# Allegro board MB1246B.brd
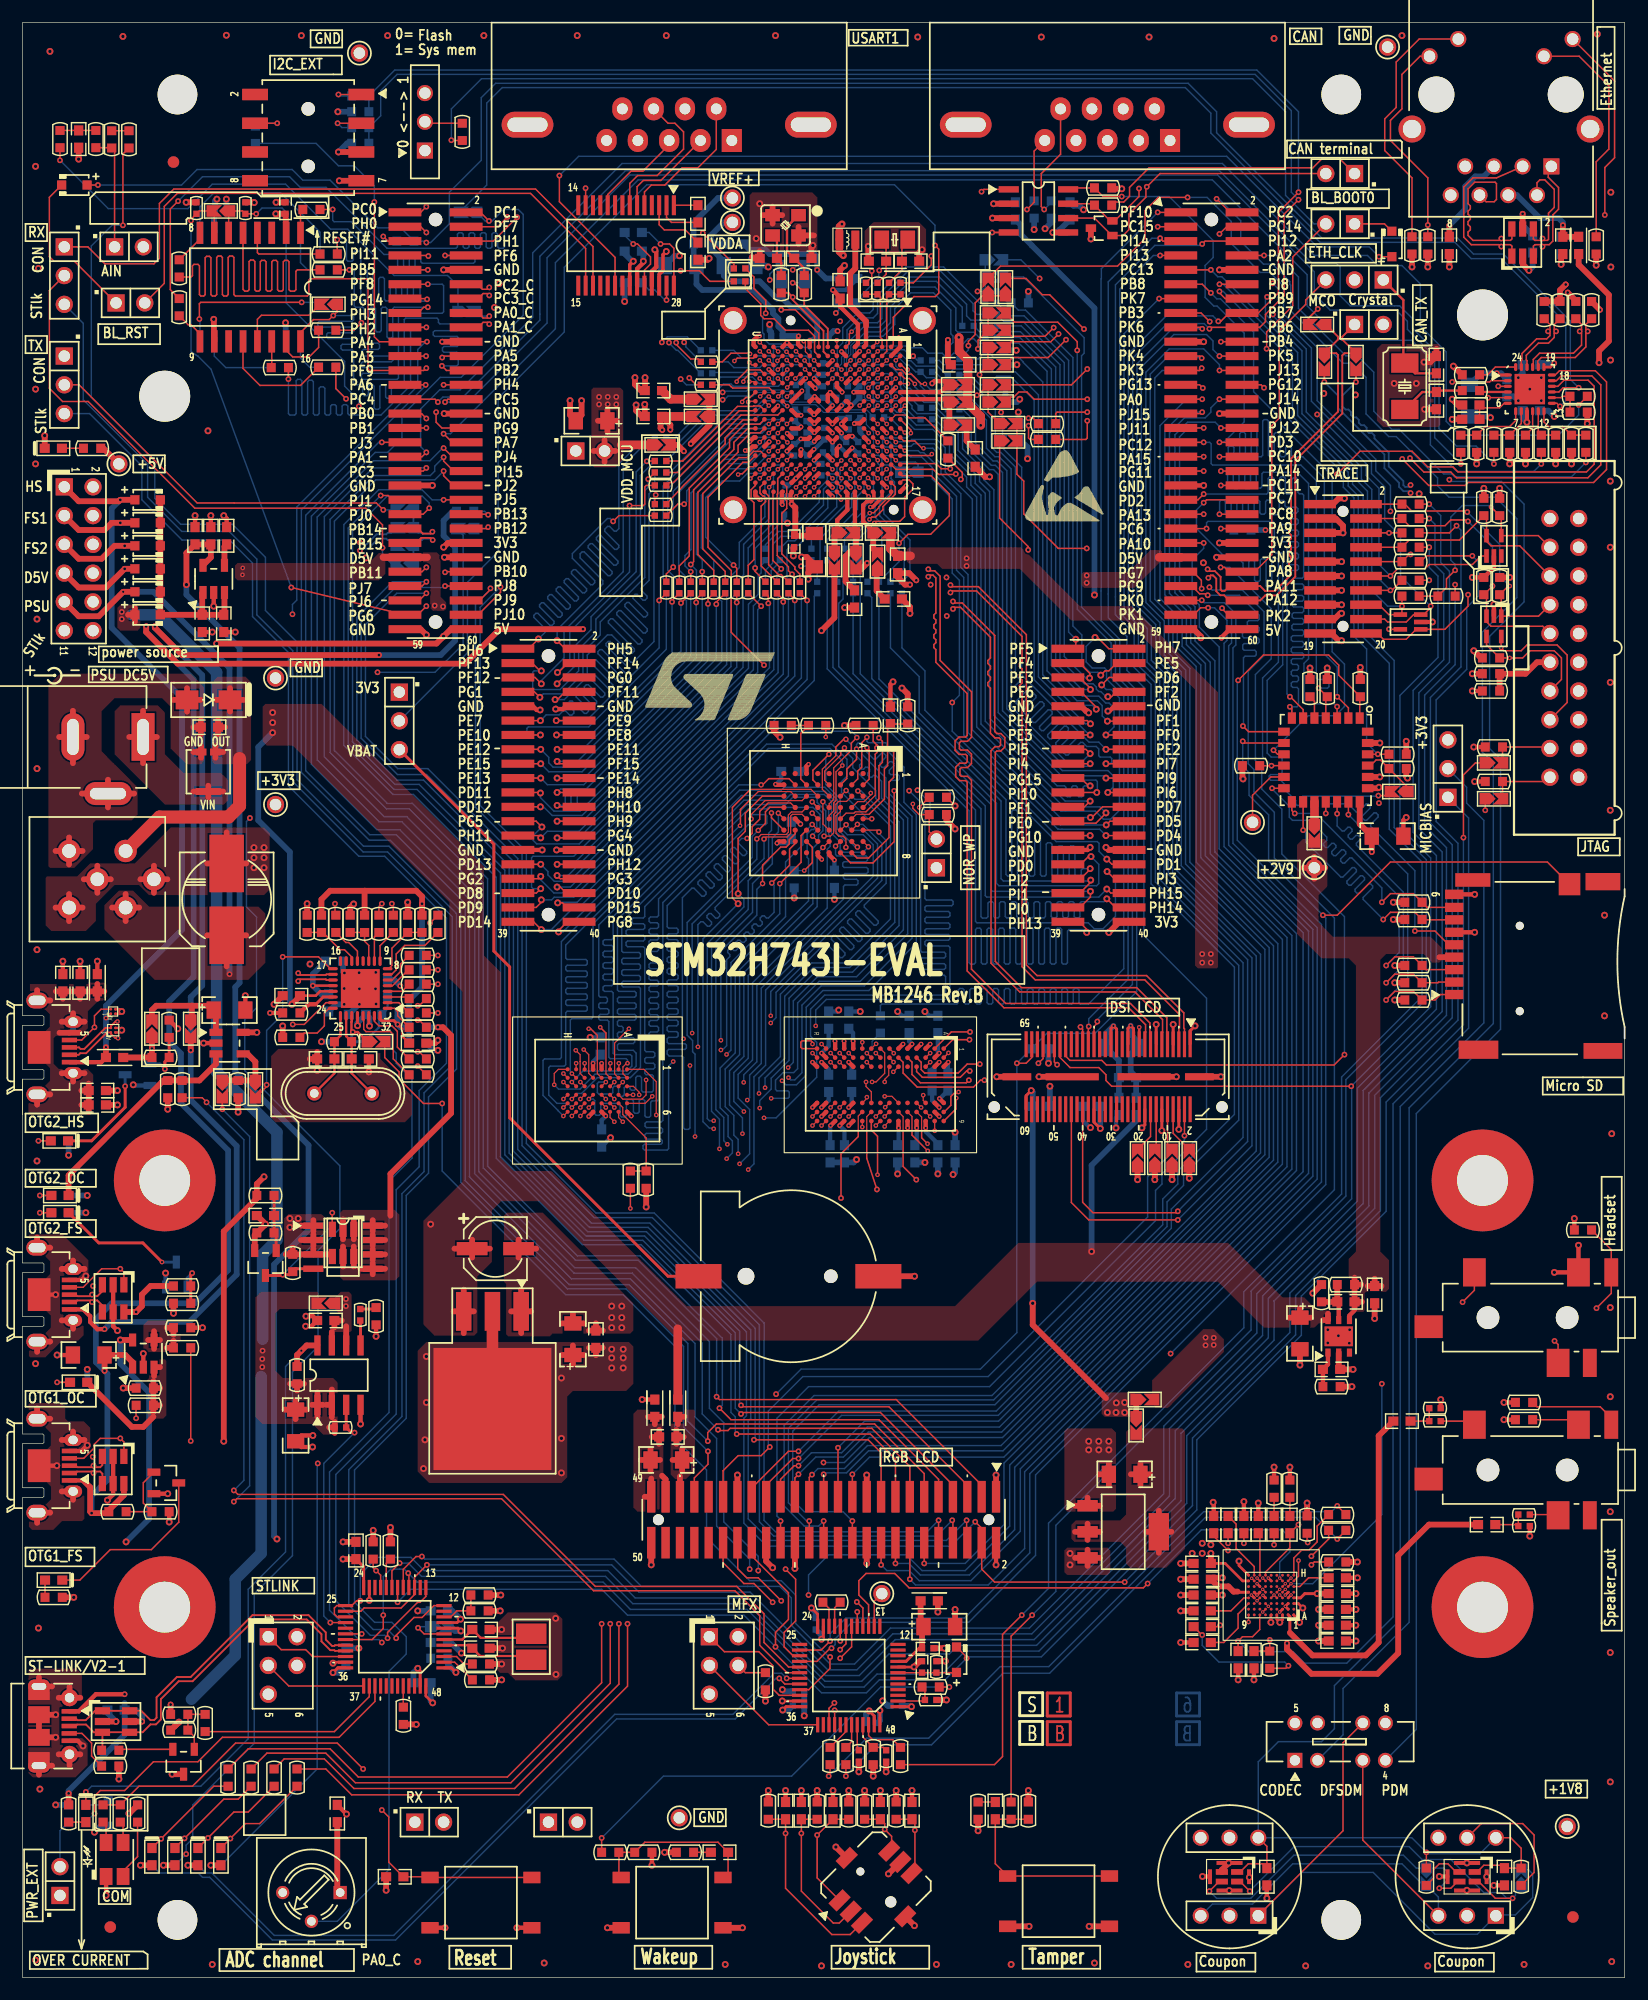
[diagram p0: board, top side]
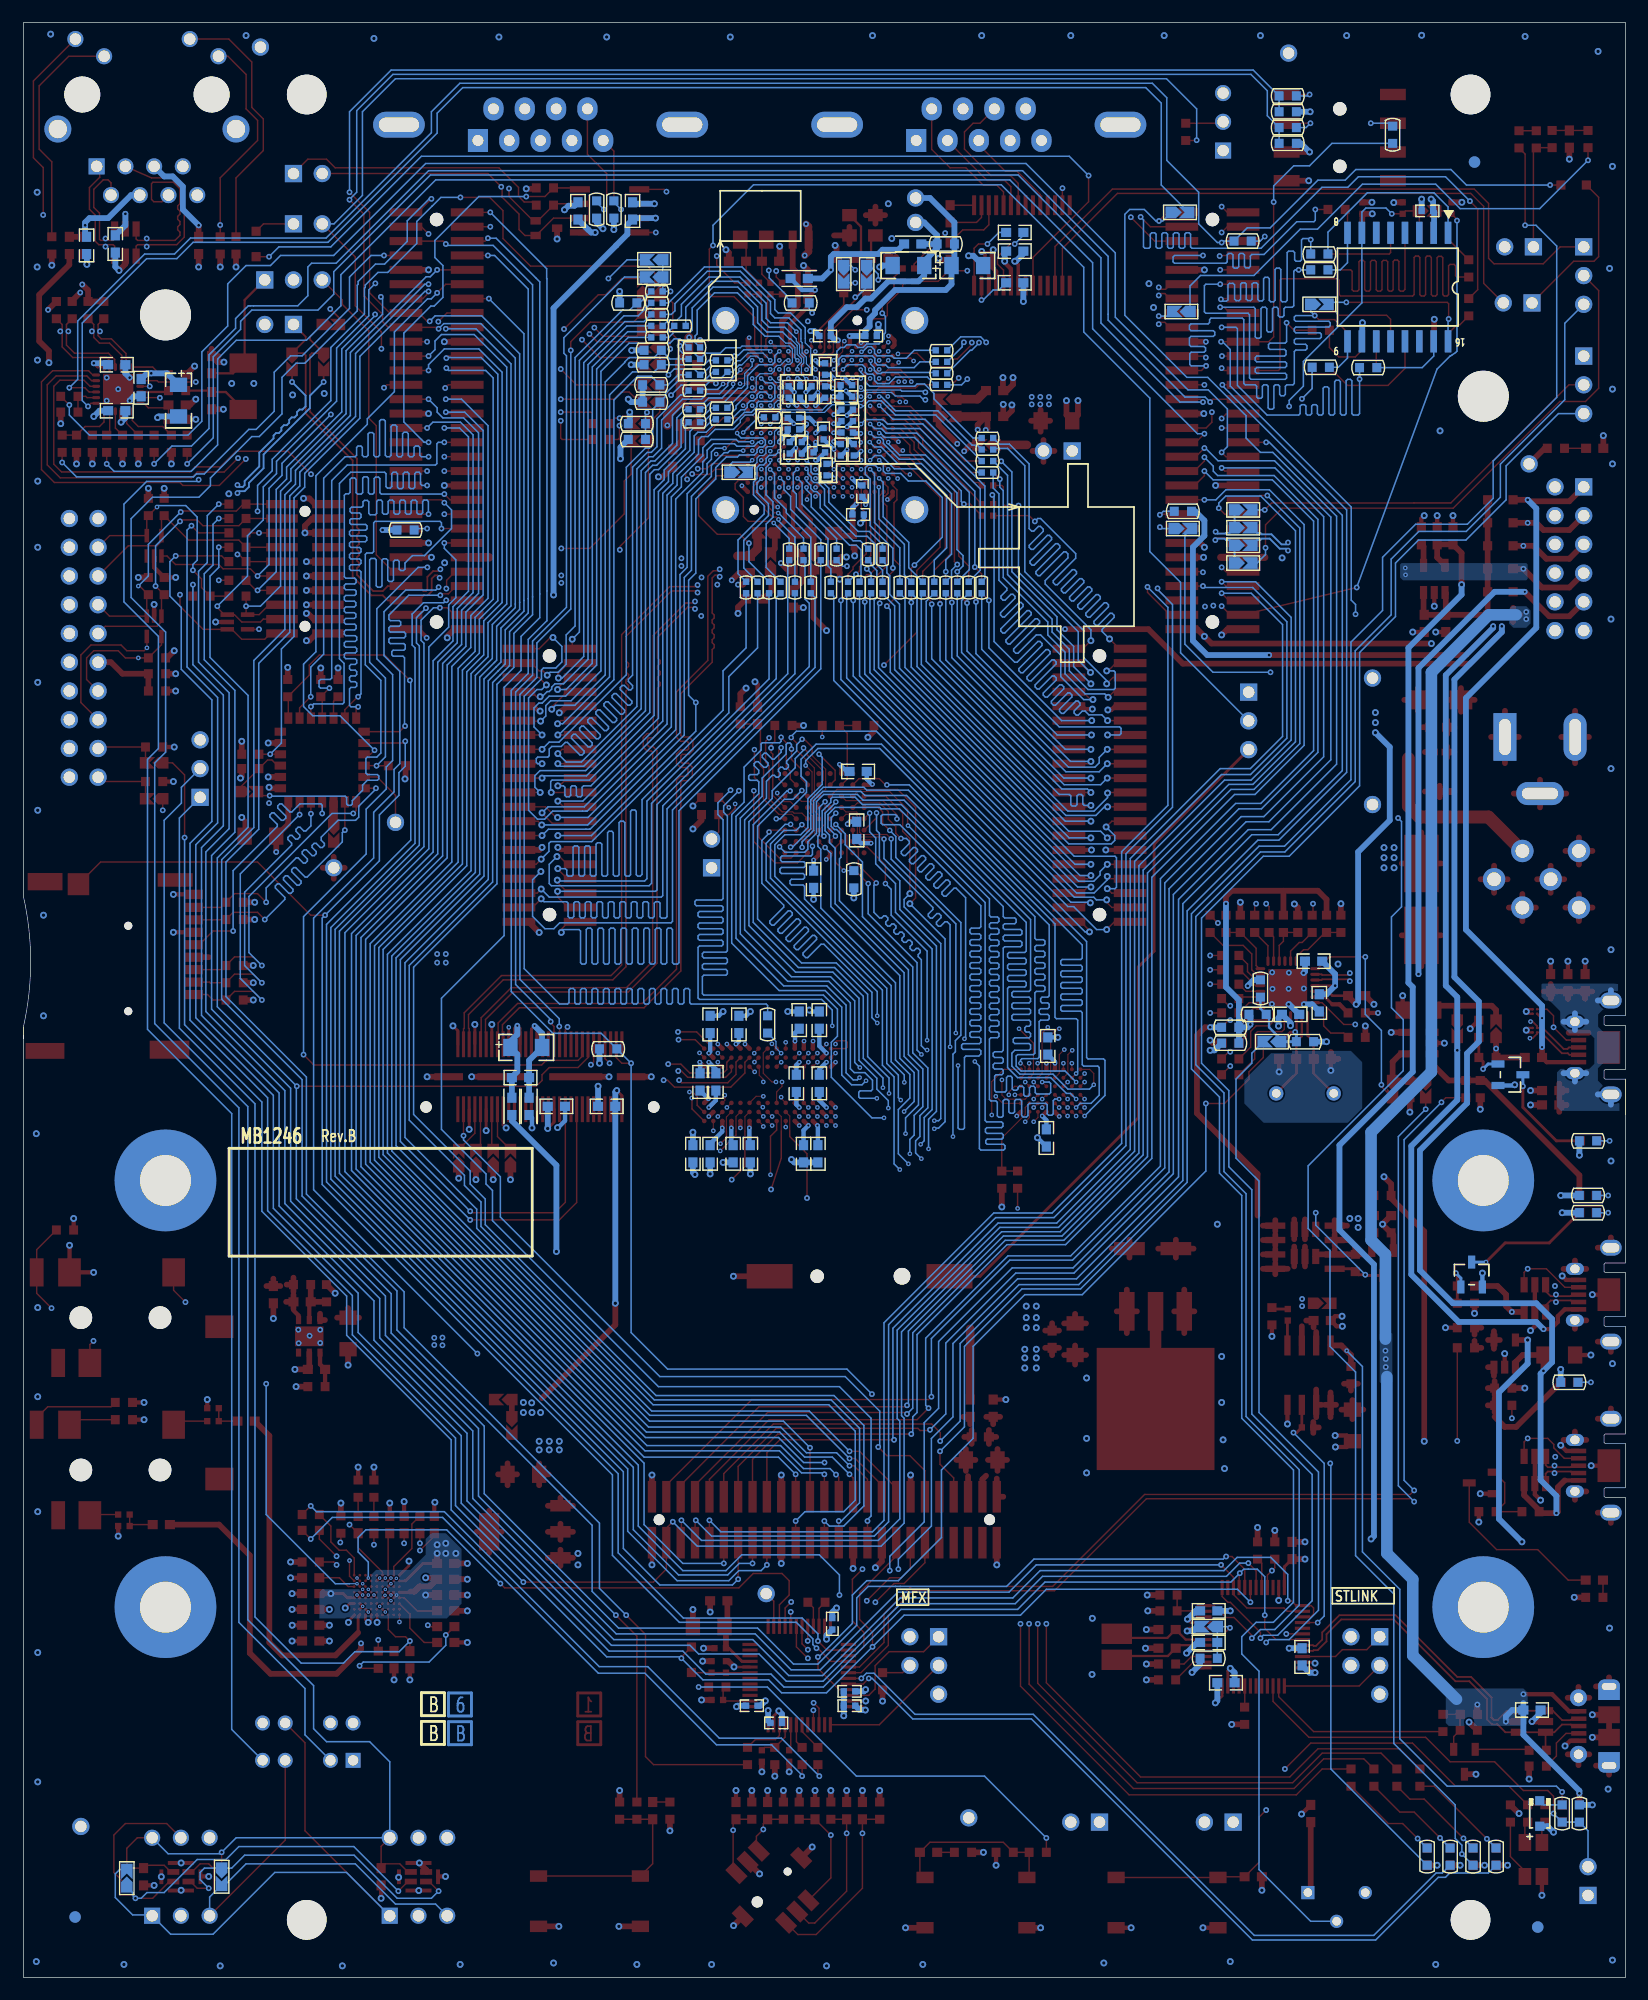
[diagram p1: board, bottom side, seen from below]

Outline 141.6 x 172.72 mm; copper layers: TOP, L2_GND, L3_VCC, L4_SIG, L5_GND, BOTTOM. Coordinates in mm from the lower left corner of the outline.
Outline path: 0,79.37 0,76.2 ; 0,79.37 0,63.13 1.79,63.13 1.89,63.03 1.89,62.38 1.79,62.27 0,62.27 0,58.38 1.79,58.38 1.89,58.27 1.89,57.62 1.79,57.52 0,57.52 0,48.01 1.79,48.01 1.89,47.91 1.89,47.26 1.79,47.16 0,47.16 0,43.26 1.79,43.26 1.89,43.16 1.89,42.51 1.79,42.41 0,42.41 0,0 141.6,0 141.6,83.26 141.6,82.95 ; 0,79.37 1.79,79.37 1.89,79.47 1.89,80.12 1.79,80.22 0,80.22 0,84.12 1.79,84.12 1.89,84.22 1.89,84.87 1.79,84.97 0,84.97 0,172.72 141.6,172.72 141.6,95.53 arc(140.96,89.75) 141.6,83.97 ; 141.6,83.97 141.6,82.95 ; 141.6,83.97 141.6,82.95

## Design rules (mm)
net group +2V9_SD: nets NETC48_1 NETM1_16
net group A0: nets A0 NETR224_2
net group A1: nets A1 NETR226_2
net group A2: nets A2 NETR222_2
net group A3: nets A3 NETR223_2
net group A4: nets A4 NETR221_2
net group A5: nets A5 NETR219_2
net group A6: nets A6 NETR250_2
net group A7: nets A7 NETR251_2
net group A8: nets A8 NETR53_2
net group A9: nets A9 NETR279_2
net group A10: nets A10 NETR50_2
net group A11: nets A11 NETR51_2
net group A12: nets A12 NETR270_2
net group A13: nets A13 NETR260_2
net group A14: nets A14 NETR261_2
net group A15: nets A15 NETR272_2
net group A16: nets A16 NETR275_1
net group A17: nets A17 NETR274_2
net group A18: nets A18 NETR271_2
net group BOOT0: nets BOOT0 NETR3_2
net group D0: nets D0 NETR77_2
net group D1: nets D1 NETR269_2
net group D2: nets D2 NETR265_2
net group D3: nets D3 NETR262_2
net group D4: nets D4 NETR54_2
net group D5: nets D5 NETR67_2
net group D6: nets D6 NETR66_2
net group D7: nets D7 NETR280_2
net group D8: nets D8 NETR68_2
net group D9: nets D9 NETR278_2
net group D10: nets D10 NETR70_2
net group D11: nets D11 NETR277_2
net group D12: nets D12 NETR69_2
net group D13: nets D13 NETR73_2
net group D14: nets D14 NETR76_2
net group D15: nets D15 NETR75_2
net group D16: nets D16 NETR71_1
net group D17: nets D17 NETR72_1
net group D18: nets D18 NETR276_1
net group D19: nets D19 NETR273_1
net group D20: nets D20 NETR74_1
net group D21: nets D21 NETR258_1
net group D22: nets D22 NETR257_1
net group D23: nets D23 NETR266_1
net group D24: nets D24 NETR256_2
net group D25: nets D25 NETR264_2
net group D26: nets D26 NETR263_2
net group D27: nets D27 NETR267_2
net group D28: nets D28 NETR243_2
net group D29: nets D29 NETR240_2
net group D30: nets D30 NETR242_2
net group D31: nets D31 NETR246_2
net group DATA: nets NETR162_2 NETR163_2
net group DIFFPAIR2: nets NETCN14_2 NETCN14_3
net group DIFFPAIR7: nets PC2_C PC3_C
net group DIFFPAIR9: nets NETCN15_15 NETCN15_17
net group DIFFPAIR10: nets NETCN15_3 NETCN15_5
net group DIFFPAIR11: nets NETCN15_9 NETCN15_11
net group DIFFPAIR12: nets NETCN18_2 NETCN18_3
net group DIFFPAIR13: nets PA11 PA12
net group LCD_B0: nets LCD_B0 NETCN9_19
net group LCD_B4: nets LCD_B4 NETLD1_2
net group LCD_B5: nets LCD_B5 NETLD2_2
net group LCD_B6: nets LCD_B6 NETLD3_2
net group LCD_B7: nets LCD_B7 NETLD4_2
net group LCD_G0: nets LCD_G0 NETCN9_17
net group MIC_CLK: nets MIC_CLK NETSB54_2
net group MIC_DATA: nets MIC_DATA NETSB55_2
net group NETC3_1: nets NETC3_1 NETC3_2
net group NETC10_1: nets NETC10_1 PC15
net group NETC11_1: nets NETC11_1 PC14
net group NETC16_1: nets NETC16_1 NETR30_1
net group NETC42_1: nets NETC42_1 NETC43_1
net group NETC61_1: nets NETC61_1 NETC61_2
net group NETC64_1: nets NETC64_1 NETC64_2
net group NETC65_1: nets NETC65_1 NETC65_2
net group NETC101_1: nets NETC101_1 NETC101_2
net group NETC147_1: nets NETC147_1 NETC147_2
net group NETCN3_7: nets NETCN3_7 NETJP1_1
net group NETCN4_4: nets NETCN4_4 PA4
net group NETCN8_2: nets NETCN8_2 PA13
net group NETCN8_4: nets NETCN8_4 PA14
net group NETCN8_8: nets NETCN8_8 PA15
net group NETCN16_2: nets NETCN16_2 PB14
net group NETCN16_3: nets NETCN16_3 PB15
net group NETD16_2: nets NETD16_2 NETJP15_2
net group NETLD6_2: nets NETLD6_2 NETR126_1
net group NETLD8_2: nets NETLD8_2 NETR146_1
net group NETM1_23: nets NETM1_23 PC6
net group NETR31_1: nets NETR31_1 PA1
net group NETR37_2: nets NETR37_2 PG13
net group NETR39_1: nets NETR39_1 PC5
net group NETR41_1: nets NETR41_1 PC4
net group NETR44_1: nets NETR44_1 PA7
net group NETR46_1: nets NETR46_1 PA2
net group NETR48_2: nets NETR48_2 PG12
net group NETR49_2: nets NETR49_2 PG11
net group NETR58_1: nets NETR58_1 PH6
net group NETR87_1: nets NETR87_1 PD7
net group NETR95_1: nets NETR95_1 PD5
net group NETR101_1: nets NETR101_1 PB5
net group NETR108_1: nets NETR108_1 PB11
net group NETR109_1: nets NETR109_1 PB10
net group NETR111_1: nets NETR111_1 PB1
net group NETR113_1: nets NETR113_1 PB0
net group NETR114_1: nets NETR114_1 PA3
net group NETR117_1: nets NETR117_1 PH4
net group NETR118_1: nets NETR118_1 PA5
net group NETR123_1: nets NETR123_1 PI11
net group NETR124_1: nets NETR124_1 PC0
net group NETR128_1: nets NETR128_1 PG10
net group NETR138_1: nets NETR138_1 NETR138_2
net group NETR166_1: nets NETR166_1 NETR166_2
net group NETR179_2: nets NETR179_2 STL_USB_DP
net group NETR185_2: nets NETR185_2 PI8
net group NETR220_2: nets NETR220_2 PI14
net group NETR245_2: nets NETR245_2 PG15
net group NETR248_1: nets NETR248_1 PH5
net group NETR252_2: nets NETR252_2 PF11
net group NETR268_2: nets NETR268_2 PG8
net group NETR282_1: nets NETR282_1 PH7
net group NETSB38_1: nets NETSB38_1 PC1
net group RD: nets RD_N RD_P
net group SDIO1: nets PC8 PD2
net group TD: nets TD_N TD_P
net group VDDA: nets VDDA VREF+
net group +1V8: nets +1V8 +1V8_LDO NETC18_2 NETC22_2 NETC30_2 NETC172_1 NETSB10_2 NETSB13_1 NETSB14_2 NETSB20_2 VDD_SDC
net group +3V3_ST_LINK: nets NETJP14_2 NETLD12_4 STM_RST
net group +5V: nets +5V NETC29_2 NETLD9_1 NETSB19_2
net group A19: nets A19 NETCN8_6 NETCN8_14 NETR236_2 NETSB8_1 PB3
net group A20: nets A20 NETCN8_16 NETCN9_3 NETCN15_37 NETR231_2 PB4
net group A21: nets A21 NETCN8_18 NETCN15_35 NETR217_2
net group A22: nets A22 NETCN8_20 NETCN15_39 NETR230_2
net group A23: nets A23 NETCN8_12 NETR234_2 NETSB11_1 PG7 SAI1_MCLKA
net group CRL: nets PD4 PD6 PE1
net group DIFFPAIR6: nets PA1_C
net group LED_STLINK: nets LED_STLINK NETLD12_2 NETLD12_3
net group MIC_VDD: nets MIC_VDD NETCN26_5 NETR206_1
net group NCS2: nets NCS2 NETR259_1 PG6
net group NETB2_2: nets NETB2_2 NETC93_1 NETR173_1 PA0
net group NETB3_2: nets NETB3_2 NETC91_1 PC13
net group NETC7_2: nets NETC7_2 NETCN5_1 NETR6_1 NETR6_2 NETR12_2 PA0_C
net group NETC8_1: nets NETC8_1 NETCN6_3 PH0
net group NETC9_1: nets NETC9_1 NETCN6_6 PH1
net group NETC35_1: nets NETC35_1 NETCN13_1 NETCN13_2 NETCN13_3 NETCN13_7 NETCN13_8
net group NETC40_1: nets NETC40_1 NETL5_1 NETR104_1 NETR116_1 NETR119_2 NETR135_2 PB13 VBUS_FS2
net group NETC55_1: nets NETC55_1 NETC55_2 NETCN19_6
net group NETC66_1: nets NETC66_1 NETC66_2 NETCN19_4
net group NETC77_1: nets NETC77_1 NETC77_2 NETC84_2
net group NETCN4_1: nets NETCN4_1 NETR160_2 NETR181_2 PB7
net group NETCN4_3: nets NETCN4_3 NETR155_2 NETR180_2 PB6
net group NETCN6_5: nets NETCN6_5 NETCN8_10 NETR284_1 RESET#
net group NETCN16_4: nets NETCN16_4 NETR105_1 PB12
net group NETLD11_1: nets NETLD11_1 NETLD11_2 NETR175_1 PWR_ENN U5V_ST_LINK USB_RENUMN VUSB_ST_LINK
net group NETR13_2: nets NETR13_2 NETR36_2 PF7
net group NETR14_2: nets NETR14_2 NETR26_1 PF6
net group NETR34_1: nets NETR34_1 NETSB12_1 NETSB44_1 PB2
net group NETR127_2: nets NETR127_2 NETSB29_1 NETSB30_1
net group NETR140_2: nets NETR141_2
net group NETR153_2: nets NETR153_2 PA9 VBUS_FS1
net group NETR225_1: nets NETR27_1 NETR29_1 NETR225_1 PG14
net group NETR228_1: nets NETR52_2 NETR228_1 NETR253_2 PH2
net group NETR229_1: nets NETR28_1 NETR229_1 NETR235_1 PH3
net group NETR232_2: nets NETR38_2 NETR232_2 PF8
net group NETR237_2: nets NETR33_2 NETR237_2 NETR244_1 PG9
net group NETR239_2: nets NETR32_1 NETR239_2 PF9
net group REFSEL0: nets REFSEL0 REFSEL1 REFSEL2 T1_D VDD_IO
net group STL_USB_D: nets STL_USB_DM

## Placement (name value [footprint] x y rotation side)
B1  TD-0341 [RESET_Black]  [PB10]  40.51 6.6 0 top
B2  WKUP  [PB10]  57.4 6.6 0 top
B3  USER (Blue)  [PB10]  91.57 6.73 0 top
B4  -  [MT-008A]  75.39 8.01 315 top
BT1  CR1220 holder  [BAT_2SM_CR1220]  67.69 61.95 0 top
C3  100nF  [0603C]  59.69 155.83 270 top
C4  100nF  [0603C]  126.11 153.03 90 top
C5  100nF  [0603C]  136.14 153.03 90 top
C6  100nF  [0603C]  59.69 152.53 90 top
C7  [N_A]  [0603C]  4.95 162.43 90 top
C8  6.7pF  [0603C]  65.91 151.89 180 top
C9  6.7pF  [0603C]  68.96 151.89 0 top
C10  10pF  [0603C]  75.56 151.64 180 top
C11  10pF  [0603C]  78.49 151.64 0 top
C12  4.7uF  [0603C]  72.26 149.1 270 top
C13  100nF  [0402C]  23.24 156.34 90 top
C14  30pF  [0603C]  124.97 142.49 90 top
C15  10uF  [0603C]  82.8 142.49 0 top
C16  30pF  [0603C]  124.97 139.32 270 top
C17  1uF_X5R_0603  [0603C]  128.02 138.94 180 top
C18  2.2uF  [0603C]  55.75 140.21 0 top
C19  470pF  [0603C]  128.02 137.67 0 top
C20  [N_A]  [0603C]  55.75 137.92 0 top
C21  4.7uF  [TAN-A]  50.29 137.54 0 top
C22  2.2uF  [0603C]  84.2 134.24 90 top
C23  1uF_X5R_0603  [0603C]  15.24 127.38 90 top
C24  100nF  [0603C]  16.64 127.38 270 top
C25  10nF_X7R_0603  [0603C]  18.03 127.38 270 top
C26  2.2uF  [0402C]  68.2 126.87 270 top
C27  2.2uF[N_A]  [1206C]  69.98 126.11 270 top
C28  10uF  [0603C]  77.34 124.84 90 top
C29  1uF_X5R_0603  [0603C]  73.53 121.79 90 top
C30  2.2uF  [0603C]  76.96 121.79 180 top
C31  100nF  [0603C]  15.88 119.63 90 top
C32  1uF_X5R_0603  [0603C]  17.78 119.63 90 top
C33  100nF  [0603C]  76.71 111.51 90 top
C34  100nF  [0603C]  16.51 110.46 180 top
C35  1uF  [TAN-A]  120.65 100.84 180 top
C36  220uF  [C310M-6]  18.03 95.25 270 top
C37  100nF  [0603C]  3.56 87.88 90 top
C38  100nF  [0603C]  5.08 87.88 90 top
C39  100nF  [0603C]  23.75 86.74 180 top
C40  4.7uF  [TAN-A]  18.29 85.47 180 top
C41  100nF  [0603C]  34.92 82.55 0 top
C42  33pF  [0603C]  26.8 81.15 180 top
C43  33pF  [0603C]  29.84 81.15 0 top
C44  100nF  [0603C]  6.6 78.36 0 top
C45  100nF  [0603C]  6.6 77.09 0 top
C46  47uF  [CAE_5R3X5R3_H5R4]  41.78 64.39 0 top
C47  10uF  [0603C]  119.51 60.33 270 top
C48  [N_A]  [0603C]  116.97 59.69 0 top
C49  100nF  [0603C]  26.8 58.04 0 top
C50  4.7uF  [TAN-A]  112.9 56.9 90 top
C51  10uF  [TAN-A]  48.64 56.39 270 top
C52  100nF  [0603C]  50.67 56.39 90 top
C53  4.7uF  [TAN-A]  5.84 54.99 0 top
C54  [N_A]  [0603C]  115.7 53.72 0 top
C55  4.7uF  [0603C]  121.92 49.15 180 top
C56  4.7uF  [TAN-A]  24.13 48.77 90 top
C57  100nF  [0603C]  57.02 47.75 180 top
C58  10uF  [TAN-A]  56.9 45.72 0 top
C59  10uF  [TAN-A]  97.41 44.45 0 top
C60  1uF  [0603C]  105.28 40.01 90 top
C61  2.2uF  [0603C]  106.55 40.01 270 top
C62  2.2uF  [0603C]  107.95 40.01 90 top
C63  2.2uF  [0603C]  109.22 40.01 90 top
C64  100nF  [0603C]  110.62 40.01 90 top
C65  100nF  [0603C]  112.01 40.01 90 top
C66  4.7uF  [0603C]  129.41 40.01 180 top
C67  100nF  [0603C]  29.46 37.72 270 top
C68  100nF  [0603C]  104.27 36.58 180 top
C69  1uF  [0603C]  116.2 35.31 0 top
C70  100nF  [0603C]  104.27 35.18 180 top
C71  4.7uF  [0603C]  116.2 33.91 0 top
C72  100nF  [0603C]  104.27 33.78 180 top
C73  1uF  [0603C]  116.2 32.51 0 top
C74  4.7uF  [0603C]  104.27 32.38 180 top
C75  100nF  [0603C]  116.2 31.11 0 top
C76  1uF  [TAN-A]  81.03 30.99 180 top
C77  1uF  [0603C]  104.27 30.99 180 top
C78  10pF  [0603C]  40.51 30.73 0 top
C79  4.7uF  [0603C]  116.2 29.72 0 top
C80  4.7uF  [0603C]  104.27 29.59 0 top
C81  10pF  [0603C]  40.51 29.08 0 top
C82  100nF  [0402C]  80.01 29.08 180 top
C83  4.7uF  [0603C]  107.44 28.07 90 top
C84  4.7uF  [0603C]  108.84 28.07 90 top
C85  100nF[N_A]  [0402C]  79.5 27.43 270 top
C86  10nF[N_A]  [0603C]  67.44 14.73 270 top
C87  10nF[N_A]  [0603C]  68.83 14.73 270 top
C88  10nF[N_A]  [0603C]  71.63 14.73 270 top
C89  10nF[N_A]  [0603C]  75.82 14.73 270 top
C90  10nF[N_A]  [0603C]  78.61 14.73 270 top
C91  100nF  [0603C]  85.98 14.73 270 top
C92  100nF  [0603C]  27.81 14.48 90 top
C93  [N_A]  [0603C]  61.59 11.05 0 top
C94  100nF  [0603C]  32.89 8.89 0 top
C95  100nF  [0603C]  109.98 8.89 270 top
C96  100nF  [0603C]  130.98 8.89 270 top
C99  100nF  [0603C]  92.58 156.08 90 bottom
C100  100nF  [0603C]  87.76 156.08 90 bottom
C101  100nF  [0603C]  53.98 154.18 0 bottom
C102  100nF  [0603C]  133.48 153.16 90 bottom
C103  100nF  [0603C]  136.02 153.03 90 bottom
C104  100nF  [0603C]  53.98 152.53 0 bottom
C105  100nF  [0603C]  53.98 149.73 0 bottom
C106  1uF  [TAN-A]  58.17 151.26 0 bottom
C107  1uF  [TAN-A]  63.37 151.26 180 bottom
C108  100nF[N_A]  [0402C]  17.5 156.08 0 bottom
C109  100nF  [0402C]  70.74 145.03 180 bottom
C110  100nF  [0402C]  66.67 145.03 0 bottom
C111  100nF  [0603C]  133.35 142.49 0 bottom
C112  100nF  [0603C]  131.19 140.46 90 bottom
C113  10uF  [TAN-A]  127.89 139.32 90 bottom
C114  100nF  [0402C]  70.74 142.11 90 bottom
C115  100nF  [0402C]  68.86 140.69 0 bottom
C116  100nF  [0603C]  133.35 138.43 180 bottom
C117  100nF  [0402C]  73.96 140.08 270 bottom
C118  100nF  [0402C]  72.95 140.08 270 bottom
C119  100nF  [0402C]  71.93 140.08 270 bottom
C120  100nF  [0402C]  70.74 140.08 270 bottom
C121  100nF  [0402C]  68.86 139.67 0 bottom
C122  100nF  [0402C]  68.78 138.53 0 bottom
C123  100nF  [0402C]  73.53 137.79 180 bottom
C124  100nF  [0402C]  68.78 137.52 0 bottom
C125  100nF  [0402C]  73.53 136.78 180 bottom
C126  100nF  [0402C]  68.78 136.5 0 bottom
C127  100nF  [0402C]  70.87 136.4 90 bottom
C128  100nF  [0402C]  73.86 135.15 90 bottom
C129  100nF  [0402C]  72.8 135.15 90 bottom
C130  100nF  [0402C]  69.34 134.98 90 bottom
C131  100nF  [0402C]  68.2 134.98 90 bottom
C132  100nF  [0402C]  71.25 134.75 0 bottom
C133  100nF  [0402C]  70.61 133.22 270 bottom
C134  100nF  [0402C]  67.44 131.32 90 bottom
C135  100nF  [0402C]  67.82 129.26 180 bottom
C136  100nF  [0603C]  67.82 106.55 180 bottom
C137  100nF  [0603C]  67.94 101.35 270 bottom
C138  100nF  [0603C]  71.75 97.03 270 bottom
C139  100nF  [0603C]  27.56 89.79 0 bottom
C140  2.2uF_X7R  [0603C]  27.05 86.11 90 bottom
C141  100nF  [0603C]  29.59 85.09 180 bottom
C142  100nF  [0603C]  73.03 84.58 90 bottom
C143  100nF  [0603C]  71.25 84.58 90 bottom
C144  100nF  [0603C]  80.9 84.2 90 bottom
C145  100nF  [0603C]  78.36 84.2 90 bottom
C146  100nF  [0603C]  51.05 82.3 90 bottom
C147  10uF  [TAN-A]  97.16 82.17 0 bottom
C148  100nF  [0603C]  97.66 79.5 180 bottom
C149  100nF  [0603C]  81.79 79.12 90 bottom
C150  100nF  [0603C]  80.39 79.12 90 bottom
C151  100nF  [0603C]  73.28 78.99 90 bottom
C152  100nF  [0603C]  71.25 78.99 90 bottom
C153  100nF  [0603C]  94.49 76.96 180 bottom
C154  100nF  [0603C]  90.04 76.96 0 bottom
C155  100nF  [0603C]  51.18 74.17 270 bottom
C156  100nF  [0603C]  82.42 72.77 270 bottom
C157  100nF  [0603C]  80.9 72.77 270 bottom
C158  100nF  [0603C]  78.87 72.77 270 bottom
C159  100nF  [0603C]  77.34 72.77 270 bottom
C160  100nF  [0603C]  72.64 72.77 270 bottom
C161  100nF  [0603C]  71.37 72.77 270 bottom
C162  100nF  [0603C]  36.83 32.38 0 bottom
C163  100nF  [0402C]  70.1 31.24 90 bottom
C164  100nF  [0603C]  36.83 29.59 180 bottom
C165  100nF  [0603C]  28.57 28.32 270 bottom
C166  100nF  [0603C]  35.31 26.04 0 bottom
C167  100nF  [0402C]  68.58 25.27 180 bottom
C168  100nF  [0402C]  77.22 24 0 bottom
C169  100nF  [0402C]  68.58 24 180 bottom
C170  100nF  [0603C]  8.26 23.62 0 bottom
C171  100nF  [0402C]  75.06 22.48 180 bottom
C172  100nF[N_A]  [0603C]  21.46 67.31 180 top
CN1  J0011D21B  [RJ45_J0011D01BNL]  135.13 160.02 0 top
CN2  DB9-male USART1  [DB9_M]  57.15 162.31 0 top
CN3  DB9-male CAN connector  [DB9_M]  95.89 162.31 0 top
CN4  F206A-2_04MGF-A  [SSM-104-L-DH]  25.24 162.56 90 top
CN5  -  [SIP2]  8.13 152.91 0 top
CN6  P1039-2_30MGF-089-1A  [FTR-130-53-L-D-LC]  36.5 137.54 270 top
CN7  P1039-2_30MGF-089-1A  [FTR-130-53-L-D-LC]  105.08 137.54 270 top
CN8  P127B-2_10MGF-079-1E7A  [FTSH-110-01-L-DV]  116.71 124.46 270 top
CN9  JTAG  [IDC20S]  135 128.91 0 top
CN10  DC-10B  [PWR_JACK_DC10]  10.64 109.6 0 top
CN11  P1039-2_20MGF-089-1A  [FTR-120-53-L-D-LC]  46.48 105.33 270 top
CN12  P1039-2_20MGF-089-1A  [FTR-120-53-L-D-LC]  95.1 105.33 270 top
CN13  PJS008-2000  [MSD_PJS008_]  132.33 85.37 90 top
CN14  475900001  [MOLEX_47590001]  4.14 82.17 270 top
CN15  -  [QSH-030-01-F-D-A]  95.95 79.58 180 top
CN16  475900001  [MOLEX_47590001]  4.14 60.33 270 top
CN17  PJ3028B-3  [PJ3028B]  136.53 58.29 180 top
CN18  475900001  [MOLEX_47590001]  4.14 45.21 270 top
CN19  PJ3028B-3  [PJ3028B]  136.53 44.83 180 top
CN20  P127B-2_25MGF-079-1A  [FTSH-125-01-F-DV]  70.8 40.44 180 top
CN21  [N_A]  [HDR_2X3-1_2R54-6]  21.72 30.1 270 top
CN22  [N_A]  [HDR_2X3-1_2R54-6]  60.71 30.1 270 top
CN23  1050170001  [MICRO_USB_B_105017]  4.04 22.21 270 top
CN24  -  [SIP2]  34.67 13.72 0 top
CN25  Coupon Connectors  [COUPON]  106.68 8.89 90 top
CN26  Coupon Connectors  [COUPON]  127.68 8.89 90 top
D1  BAT60JFILM  [SOD-323]  4.57 158.37 180 top
D2  ESDCAN02-2BWY  [SOT-323]  95.38 154.56 0 top
D3  BAT60JFILM  [SOD-323]  121.03 153.16 90 top
D4  BAT60JFILM  [SOD-323]  11.05 130.56 0 top
D5  BAT60JFILM  [SOD-323]  11.05 128.52 0 top
D6  BAT60JFILM  [SOD-323]  11.05 126.49 0 top
D7  BAT60JFILM  [SOD-323]  11.05 124.46 0 top
D8  BAT60JFILM  [SOD-323]  11.05 122.43 0 top
D9  BAT60JFILM  [SOD-323]  11.05 120.4 0 top
D10  ZEN056V130A24LS  [TYCO_ZEN056V130A24LS]  16.41 106.53 90 top
D11  ESDA14V2-2BF3  [BGA4_0R4_0R8X0R8]  8 85.34 90 top
D12  USBULC6-2F3  [BGA4_0R4_1X1]  8 83.69 90 top
D13  ESDA6V1BC6  [SOT23-6L]  8 59.99 180 top
D14  ESDA6V1BC6  [SOT23-6L]  8 44.83 180 top
D15  BAT60JFILM  [SOD-323]  82.55 28.07 90 top
D16  BAT60JFILM  [SOD-323]  7.57 14.48 90 bottom
H1  POSITION HOLE  [HOLE_C9D4R5]  12.56 70.42 0 top
H2  POSITION HOLE  [HOLE_C9D4R5]  129.04 70.42 0 top
H3  POSITION HOLE  [HOLE_C9D4R5]  12.56 32.71 0 top
H4  POSITION HOLE  [HOLE_C9D4R5]  129.04 32.71 0 top
JP1  -  [SIP2]  117.73 159.38 180 top
JP2  -  [SIP2]  117.73 146.05 0 top
JP3  -  [SIP2]  117.73 154.94 180 top
JP5  -  [SIP3]  120.27 149.99 180 top
JP6  -  [SIP2]  8.26 147.96 0 top
JP7  -  [SIP3]  3.68 143.26 270 top
JP8  -  [SIP3]  3.68 152.91 270 top
JP9  -  [SIP2]  48.9 134.87 0 top
JP10  Header 6X2  [HDR_2X6_2R54]  3.68 131.7 270 top
JP11  -  [SIP3]  33.3 113.56 270 top
JP12  -  [SIP3]  125.98 104.27 90 top
JP13  -  [SIP2]  80.77 98.04 90 top
JP14  [N_A]  [SIP2]  46.48 13.72 0 top
JP15  -  [SIP2]  3.3 7.24 90 top
L1  2.2uH(LQM2MPN2R2NG0)  [LSM2_VLS2016E_S]  72.9 153.54 0 top
L2  BEAD  [0603L]  137.54 153.03 270 top
L3  BNX002-01  [BNX001]  6.6 97.03 0 top
L4  EXC-3BP121H[BEAD]  [0603L]  6.6 87.88 270 top
L5  EXC-3BP121H[BEAD]  [0603L]  8.13 81.28 180 top
L6  BEAD(FCM1608KF-601T03)  [0603L]  55.88 50.29 270 top
L7  BEAD(FCM1608KF-601T03)  [0603L]  57.91 50.29 270 top
L8  Ferrite  [0603L]  80.14 33.27 180 top
L9  BEAD(FCM1608KF-601T03)  [0603L]  62.99 153.16 180 bottom
L10  BEAD(FCM1608KF-601T03)  [0603L]  73.03 150.11 0 bottom
L11  BEAD(FCM1608KF-601T03)  [0603L]  98.42 76.96 90 bottom
L12  BEAD(FCM1608KF-601T03)  [0603L]  96.9 76.96 90 bottom
LD1  Green  [0603D]  17.53 10.67 90 top
LD2  Orange  [0603D]  15.49 10.67 90 top
LD3  Red  [0603D]  13.46 10.67 90 top
LD4  Blue  [0603D]  11.43 10.67 90 top
LD5  Green  [0603D]  3.25 73.91 0 top
LD6  Red  [0603D]  3.3 69.09 0 top
LD7  Green  [0603D]  3.3 67.56 0 top
LD8  Red  [0603D]  4.95 52.58 0 top
LD9  red  [0603D]  2.71 135.11 180 top
LD10  Green  [0603D]  2.74 35.1 0 top
LD11  Red  [0603D]  5.59 14.48 90 top
LD12  HSMF-A201-A00J1  [LED2_3528]  8.13 10.41 0 top
M1  IP4856CX25_C_Module_REV  [WLCSP25_0R4_MOUDLE_REV]  115.19 107.57 180 top
NOREF  -  [unnamed]  12.56 139.71 0 top
NOREF#2  -  [#2]  283.34 118.87 0 top
NOREF#3  -  [#2]  4.7 228.5 0 top
NOREF#4  -  [#2]  450.6 -120.4 0 top
NOREF#5  -  [#2]  91.33 23.35 0 top
NOREF#6  -  [unnamed]  13.34 160.4 0 top
NOREF#7  -  [unnamed]  13.69 166.37 0 top
NOREF#8  -  [unnamed]  137.03 5.33 0 top
NOREF#9  -  [#2]  91.33 20.81 0 top
NOREF#10  -  [unnamed]  13.69 5.08 0 top
NOREF#11  -  [unnamed]  7.75 4.45 0 top
NOREF#12  -  [#2]  13.59 -41.66 0 top
NOREF#13  -  [unnamed]  116.56 5.08 0 top
NOREF#14  -  [#2]  -7.62 0 0 top
NOREF#15  -  [unnamed]  129.04 146.89 0 top
NOREF#16  -  [unnamed]  116.56 166.37 0 top
NOREF#17  -  [#2]  322.2 176.15 0 top
NOREF#18  -  [unnamed]  137.03 5.33 180 bottom
NOREF#19  -  [unnamed]  7.75 4.45 180 bottom
NOREF#20  -  [unnamed]  13.34 160.4 180 bottom
R3  10K  [0603R]  38.86 163.07 90 top
R4  10K  [0603R]  95.5 158.12 0 top
R5  120  [0603R]  95.5 156.59 0 top
R6  0  [0603R]  9.4 162.41 270 top
R7  270  [0603R]  122.81 153.03 270 top
R8  10K  [0603R]  124.21 153.03 270 top
R9  270  [0603R]  139.09 153.03 270 top
R10  47  [0603R]  7.87 162.41 90 top
R11  0  [0603R]  6.48 162.43 270 top
R12  0  [0603R]  3.3 162.43 270 top
R13  33  [0402R]  63.37 151 0 top
R14  33  [0402R]  63.37 149.86 0 top
R15  0  [0603R]  67.06 149.61 270 top
R16  0  [0603R]  69.09 149.61 270 top
R17  0  [0402R]  75.56 149.22 90 top
R18  0  [0402R]  76.58 149.22 90 top
R19  10K  [0402R]  15.37 156.34 90 top
R20  10K  [0402R]  19.68 156.34 90 top
R21  12K1  [0603R]  128.02 141.6 180 top
R22  50  [0603R]  134.49 147.32 90 top
R23  50  [0603R]  135.89 147.32 90 top
R24  50  [0603R]  137.29 147.32 90 top
R25  50  [0603R]  138.68 147.32 90 top
R26  33  [0603R]  25.53 156.21 0 top
R27  33  [0603R]  27.05 152.27 0 top
R28  33  [0603R]  27.05 150.88 0 top
R29  33  [0402R]  60.45 142.75 180 top
R30  0  [0603R]  128.02 140.21 180 top
R31  33  [0603R]  137.54 139.7 0 top
R32  33  [0603R]  13.84 151 270 top
R33  33  [0603R]  26.92 142.27 180 top
R34  33  [0402R]  60.45 140.72 180 top
R35  10K  [0603R]  137.54 138.3 180 top
R36  33  [0603R]  13.84 147.57 270 top
R37  33  [0603R]  90.55 137.29 180 top
R38  33  [0603R]  26.92 145.54 180 top
R39  33  [0603R]  127.13 135.51 270 top
R40  10K  [0603R]  128.52 135.51 90 top
R41  33  [0603R]  130.05 135.51 270 top
R42  10K  [0603R]  131.44 135.51 90 top
R43  10K  [0603R]  132.84 135.51 270 top
R44  33  [0603R]  134.24 135.51 270 top
R45  10K  [0603R]  135.51 135.51 90 top
R46  1K5  [0603R]  136.91 135.51 270 top
R47  0  [0603R]  138.18 135.51 270 top
R48  33  [0603R]  90.55 135.89 180 top
R49  33  [0603R]  81.79 135 90 top
R50  33  [0402R]  56.39 133.99 0 top
R51  33  [0402R]  56.39 132.97 0 top
R52  33  [0603R]  22.73 142.24 180 top
R53  33  [0402R]  56.39 131.83 0 top
R54  33  [0402R]  56.39 130.18 0 top
R55  22  [0603R]  122.68 130.18 0 top
R56  [N_A]  [0603R]  129.16 129.92 90 top
R57  [N_A]  [0603R]  130.56 129.92 90 top
R58  33  [0402R]  56.39 129.16 180 top
R59  22  [0603R]  122.68 128.91 0 top
R60  22  [0603R]  122.68 127.64 0 top
R61  22  [0603R]  122.68 126.36 0 top
R62  22  [0603R]  122.68 125.09 0 top
R63  [N_A]  [0603R]  122.68 123.44 0 top
R64  [N_A]  [0603R]  129.16 122.94 270 top
R65  [N_A]  [0603R]  130.56 122.94 90 top
R66  33  [0402R]  56.9 122.81 90 top
R67  33  [0402R]  58.04 122.81 90 top
R68  33  [0402R]  59.05 122.81 90 top
R69  33  [0402R]  60.07 122.81 90 top
R70  33  [0402R]  61.09 122.81 90 top
R71  33  [0402R]  62.1 122.81 270 top
R72  33  [0402R]  63.12 122.81 270 top
R73  33  [0402R]  64.14 122.81 90 top
R74  33  [0402R]  65.66 122.81 270 top
R75  33  [0402R]  66.67 122.81 90 top
R76  33  [0402R]  67.69 122.81 90 top
R77  33  [0402R]  68.71 122.81 90 top
R78  [N_A]  [0603R]  122.68 122.05 0 top
R79  22  [0603R]  125.86 122.05 0 top
R80  [N_A]  [0603R]  129.79 116.59 180 top
R81  [N_A]  [0603R]  129.79 115.19 180 top
R82  10K  [0603R]  113.79 113.92 90 top
R83  10K  [0603R]  115.32 113.92 90 top
R84  10K  [0603R]  118.24 113.92 270 top
R85  10K  [0603R]  129.79 113.67 0 top
R86  10K  [0603R]  78.23 111.51 270 top
R87  10K  [0603R]  67.18 110.62 180 top
R88  0  [0603R]  70.23 110.62 0 top
R89  10K  [0603R]  74.42 110.62 180 top
R90  10K  [0603R]  130.05 108.71 0 top
R91  10K  [0603R]  121.54 108.08 0 top
R92  10K  [0603R]  108.58 107.06 180 top
R93  10K  [0603R]  121.54 106.81 0 top
R94  10K  [0603R]  130.05 105.66 0 top
R95  0  [0603R]  80.9 104.27 0 top
R96  10K  [0603R]  80.9 102.74 0 top
R97  [N_A]  [0603R]  122.94 95 0 top
R98  [N_A]  [0603R]  122.94 93.47 0 top
R99  [N_A]  [0603R]  25.15 93.09 270 top
R100  0  [0603R]  26.42 93.09 90 top
R101  0  [0603R]  27.69 93.09 90 top
R102  [N_A]  [0603R]  28.96 93.09 270 top
R103  0  [0603R]  30.23 93.09 90 top
R104  0  [0603R]  31.5 93.09 90 top
R105  0  [0603R]  32.77 93.09 90 top
R106  [N_A]  [0603R]  34.04 93.09 270 top
R107  0  [0603R]  35.31 93.09 90 top
R108  0  [0603R]  36.7 93.09 90 top
R109  0  [0603R]  34.92 90.3 0 top
R110  [N_A]  [0603R]  122.94 89.41 0 top
R111  0  [0603R]  34.92 89.03 0 top
R112  [N_A]  [0603R]  122.94 87.88 0 top
R113  0  [0603R]  34.92 87.76 0 top
R114  0  [0603R]  34.92 86.49 0 top
R115  [N_A]  [0603R]  122.94 86.36 0 top
R116  820  [0603R]  23.75 85.22 180 top
R117  0  [0603R]  34.92 85.22 0 top
R118  33  [0603R]  34.92 83.95 0 top
R119  22K  [0603R]  12.95 83.82 270 top
R120  8K06_1%  [0603R]  23.75 83.06 180 top
R121  1M  [0603R]  28.32 82.68 0 top
R122  47K  [0603R]  12.19 81.28 180 top
R123  0  [0603R]  34.92 81.15 0 top
R124  0  [0603R]  34.92 79.76 0 top
R125  3K3  [0603R]  12.83 78.49 90 top
R126  0  [0603R]  14.1 78.49 90 top
R127  10K  [0603R]  19.05 78.49 90 top
R128  0  [0603R]  53.72 70.48 270 top
R129  10K  [0603R]  55.12 70.48 270 top
R130  10K  [0603R]  21.46 69.09 0 top
R131  [N_A]  [0603R]  137.92 66.04 0 top
R132  10K  [0603R]  21.46 65.79 180 top
R133  1K  [0603R]  23.88 63.12 90 top
R134  22K[1%]  [0603R]  116.97 61.21 180 top
R135  47K  [0603R]  14.1 61.09 0 top
R136  16K[1%]  [0603R]  114.81 60.45 90 top
R137  22K  [0603R]  14.1 59.56 0 top
R138  2K2  [0402R]  29.84 58.55 270 top
R139  0  [0603R]  31.24 58.42 90 top
R140  10K  [0603R]  14.1 57.4 180 top
R141  0  [0603R]  14.1 55.63 0 top
R142  100K  [0603R]  24.26 53.21 90 top
R143  1K  [0603R]  115.7 52.2 0 top
R144  47K  [0603R]  10.79 52.07 0 top
R145  0  [0603R]  132.72 50.8 180 top
R146  0  [0603R]  10.79 50.55 0 top
R147  1K  [0402R]  124.84 50.29 0 top
R148  0  [0603R]  132.72 49.28 180 top
R149  180  [0402R]  124.84 49.15 0 top
R150  10K  [0402R]  28.09 48.59 0 top
R151  20  [0603R]  110.62 43.18 90 top
R152  20  [0603R]  112.01 43.18 90 top
R153  47K  [0603R]  8.38 41.15 0 top
R154  22K  [0603R]  12.19 41.15 180 top
R155  0  [0603R]  116.2 40.89 180 top
R156  180  [0402R]  132.72 40.89 180 top
R157  4K7  [0603R]  113.54 40.01 90 top
R158  1K  [0402R]  132.72 39.88 180 top
R159  820  [0603R]  6.14 135.11 0 top
R160  0  [0603R]  116.2 39.5 180 top
R161  [N_A]  [0603R]  30.99 37.72 270 top
R162  100K  [0603R]  32.51 37.72 270 top
R163  [N_A]  [0603R]  116.2 36.7 180 top
R164  4K7  [0603R]  40.39 33.78 180 top
R165  330  [0603R]  2.74 33.58 0 top
R166  [N_A]  [0603R]  71.5 33.15 180 top
R167  4K7  [0603R]  40.39 32.38 180 top
R168  2K2  [0603R]  110.24 28.07 90 top
R169  [N_A]  [0603R]  40.51 27.69 180 top
R170  10K[N_A]  [0402R]  80.77 27.43 90 top
R171  10K  [0603R]  40.51 26.29 180 top
R172  0  [0603R]  65.66 26.16 90 top
R173  0  [0603R]  80.26 25.65 0 top
R174  47K[N_A]  [0402R]  80.26 24.51 180 top
R175  10K  [0603R]  13.84 23.24 180 top
R176  100K  [0603R]  33.66 23.11 90 top
R177  100  [0603R]  16.13 22.48 270 top
R178  36K  [0603R]  13.84 21.84 0 top
R179  1K5  [0603R]  7.75 20.07 0 top
R180  0  [0603R]  71.37 19.56 90 top
R181  0  [0603R]  72.77 19.56 90 top
R182  510  [0402R]  73.91 19.56 270 top
R183  [N_A]  [0603R]  75.18 19.56 270 top
R184  10K  [0402R]  76.33 19.56 270 top
R185  0  [0603R]  77.6 19.56 90 top
R186  100K  [0603R]  7.75 18.67 0 top
R187  10K[N_A]  [0603R]  65.91 14.73 270 top
R188  10K[N_A]  [0603R]  70.23 14.73 270 top
R189  10K[N_A]  [0603R]  73.03 14.73 270 top
R190  10K[N_A]  [0603R]  74.42 14.73 270 top
R191  10K[N_A]  [0603R]  77.22 14.73 270 top
R192  100  [0603R]  84.45 14.73 90 top
R193  0  [0603R]  87.38 14.73 90 top
R194  4K7  [0603R]  88.9 14.73 90 top
R195  1K  [0603R]  4.06 14.48 270 top
R196  100  [0603R]  7.11 14.48 270 top
R197  100  [0603R]  8.64 14.48 270 top
R198  0  [0603R]  10.16 14.48 90 top
R199  680[MIPI]  [0603R]  18.16 17.65 270 top
R200  680[MIPI]  [0603R]  20.19 17.65 270 top
R201  680[MIPI]  [0603R]  22.23 17.65 270 top
R202  510[MIPI]  [0603R]  24.26 17.65 270 top
R203  330  [0603R]  51.94 11.05 180 top
R204  220K  [0603R]  54.86 11.05 0 top
R205  100  [0603R]  58.55 11.05 0 top
R206  10K  [0603R]  124.08 8.89 90 top
R207  10K  [0603R]  132.46 8.89 90 top
R208  0  [0603R]  29.84 166.24 180 bottom
R209  1K5  [0603R]  29.84 164.85 0 bottom
R210  0  [0603R]  29.84 163.45 180 bottom
R211  0  [0603R]  20.57 162.81 270 bottom
R212  1K5  [0603R]  29.84 162.05 0 bottom
R213  [N_A]  [0603R]  90.93 156.21 90 bottom
R214  0  [0603R]  89.41 156.21 90 bottom
R215  820  [0603R]  33.83 153.42 180 bottom
R216  0  [0603R]  60.07 153.16 180 bottom
R217  33  [0402R]  85.6 148.97 180 bottom
R218  220K  [0603R]  88.14 147.96 0 bottom
R219  33  [0402R]  85.6 147.96 180 bottom
R220  0  [0603R]  72.9 147.96 180 bottom
R221  33  [0402R]  85.6 146.94 180 bottom
R222  33  [0402R]  85.6 145.92 180 bottom
R223  33  [0402R]  83.57 145.92 180 bottom
R224  33  [0402R]  85.6 144.91 180 bottom
R225  33[N_A]  [0603R]  27.05 152.27 0 bottom
R226  33  [0402R]  82.3 144.02 180 bottom
R227  220K  [0603R]  85.98 143.76 0 bottom
R228  33  [0402R]  60.45 143.76 180 bottom
R229  33[N_A]  [0603R]  27.05 150.88 0 bottom
R230  33  [0402R]  82.3 143 180 bottom
R231  33  [0402R]  79.88 142.88 180 bottom
R232  33  [0402R]  60.45 142.75 0 bottom
R233  220K  [0603R]  85.98 142.49 0 bottom
R234  33  [0402R]  79.88 141.86 180 bottom
R235  33  [0402R]  60.45 141.73 180 bottom
R236  33  [0402R]  82.3 141.6 180 bottom
R237  33[N_A]  [0603R]  26.92 142.27 180 bottom
R238  220K  [0603R]  86.11 140.72 0 bottom
R239  33  [0402R]  60.45 140.72 0 bottom
R240  33  [0402R]  82.3 140.21 180 bottom
R241  220K  [0603R]  86.11 139.19 0 bottom
R242  33  [0402R]  79.88 138.68 180 bottom
R243  33  [0402R]  82.3 138.56 180 bottom
R244  33  [0402R]  75.64 137.85 180 bottom
R245  33  [0402R]  79.88 137.67 180 bottom
R246  33  [0402R]  82.3 137.41 180 bottom
R247  10K  [0603R]  87.38 137.29 180 bottom
R248  33  [0402R]  56.39 136.02 180 bottom
R249  [N_A]  [0603R]  87.38 135.89 180 bottom
R250  33  [0402R]  56.39 135 0 bottom
R251  33  [0402R]  56.39 133.99 0 bottom
R252  33  [0402R]  56.39 132.97 0 bottom
R253  33[N_A]  [0603R]  22.73 142.24 180 bottom
R254  [N_A]  [0603R]  39.12 129.54 0 bottom
R255  10K  [0603R]  107.82 127.89 180 bottom
R256  33  [0402R]  73.91 125.73 90 bottom
R257  33  [0402R]  72.64 125.73 270 bottom
R258  33  [0402R]  71.12 125.73 270 bottom
R259  33  [0402R]  69.72 125.73 270 bottom
R260  33  [0402R]  66.93 125.73 90 bottom
R261  33  [0402R]  65.66 125.73 90 bottom
R262  33  [0402R]  77.72 122.81 90 bottom
R263  33  [0402R]  76.71 122.81 90 bottom
R264  33  [0402R]  75.69 122.81 90 bottom
R265  33  [0402R]  74.68 122.81 90 bottom
R266  33  [0402R]  73.41 122.81 270 bottom
R267  33  [0402R]  72.01 122.81 90 bottom
R268  33  [0402R]  70.23 122.81 90 bottom
R269  33  [0402R]  68.71 122.81 90 bottom
R270  33  [0402R]  67.69 122.81 90 bottom
R271  33  [0402R]  66.67 122.81 90 bottom
R272  33  [0402R]  65.66 122.81 90 bottom
R273  33  [0402R]  64.14 122.81 270 bottom
R274  33  [0402R]  63.12 122.81 90 bottom
R275  33  [0402R]  62.1 122.81 270 bottom
R276  33  [0402R]  61.09 122.81 270 bottom
R277  33  [0402R]  60.07 122.81 90 bottom
R278  33  [0402R]  59.05 122.81 90 bottom
R279  33  [0402R]  58.04 122.81 90 bottom
R280  33  [0402R]  56.9 122.81 90 bottom
R281  10K  [0603R]  68.2 97.03 270 bottom
R282  0  [0603R]  75.82 84.2 90 bottom
R283  0  [0603R]  34.92 83.95 180 bottom
R284  [N_A]  [0603R]  28.32 82.68 180 bottom
R285  [N_A]  [0603R]  34.92 82.55 180 bottom
R286  10K  [0603R]  89.92 82.04 0 bottom
R287  330  [0603R]  3.3 73.91 0 bottom
R288  620  [0603R]  3.3 69.09 0 bottom
R289  330  [0603R]  3.3 67.56 0 bottom
R290  620  [0603R]  4.95 52.58 0 bottom
R291  100K  [0603R]  36.83 28.19 0 bottom
R292  2K7  [0603R]  5.59 14.48 270 bottom
R293  4K7  [0603R]  4.06 14.48 90 bottom
R294  510[RGB]  [0603R]  17.53 10.67 90 bottom
R295  680[RGB]  [0603R]  15.49 10.67 90 bottom
R296  680[RGB]  [0603R]  13.46 10.67 90 bottom
R297  680[RGB]  [0603R]  11.43 10.67 90 bottom
R298  4K7  [0603R]  32.51 85.09 0 bottom
R299  100K  [0603R]  32.26 87.38 270 bottom
RV1  3386P-103(10K)  [3386P]  25.53 7.49 180 top
SB1  Open  [0402R]  77.6 149.22 90 top
SB2  Closed  [SB_0603]  85.34 149.35 270 top
SB3  Closed  [SB_0603]  86.87 149.35 270 top
SB4  Open  [0402R]  74.55 149.22 90 top
SB5  Closed  [SB_0603]  86.11 147.07 180 top
SB6  Closed  [SB_0603]  17.53 156.08 0 top
SB7  Closed  [SB_0603]  86.11 145.54 180 top
SB8  Closed  [SB_0603]  86.11 144.02 180 top
SB9  Closed  [SB_0603]  86.11 142.49 180 top
SB10  Open  [SB_0603]  82.68 140.72 180 top
SB11  Closed  [SB_0603]  86.11 140.72 180 top
SB12  Closed  [SB_0603]  27.05 147.83 0 top
SB13  Closed  [SB_0603]  59.94 139.45 180 top
SB14  Open  [SB_0603]  82.68 139.19 180 top
SB15  Closed  [SB_0603]  86.11 139.19 180 top
SB16  Open  [SB_0603]  59.94 137.92 0 top
SB17  Open  [SB_0603]  82.68 137.16 180 top
SB18  Closed  [SB_0603]  56.46 135.41 180 top
SB19  Closed  [SB_0603]  72.77 127.64 180 top
SB20  Open  [SB_0603]  75.95 127.64 180 top
SB21  Open  [SB_0603]  71.75 125.22 90 top
SB22  Closed  [SB_0603]  73.66 125.22 90 top
SB23  Closed  [SB_0603]  75.56 125.09 270 top
SB24  Open  [SB_0603]  130.05 107.31 180 top
SB25  Open  [SB_0603]  130.05 104.14 180 top
SB26  Closed  [SB_0603]  114.17 101.09 90 top
SB27  Closed  [SB_0603]  11.43 83.82 270 top
SB28  Open  [SB_0603]  14.86 83.82 90 top
SB29  Open  [SB_0603]  17.65 78.49 90 top
SB30  Closed  [SB_0603]  20.57 78.49 90 top
SB31  Closed  [SB_0603]  98.55 72.39 270 top
SB32  Closed  [SB_0603]  100.08 72.39 270 top
SB33  Closed  [SB_0603]  101.6 72.39 270 top
SB34  Closed  [SB_0603]  103.12 72.39 270 top
SB35  Open  [SB_0603]  26.8 59.56 0 top
SB36  Open  [SB_0603]  99.19 51.05 180 top
SB37  Closed  [SB_0603]  98.42 48.77 90 top
SB38  Closed  [SB_0603]  39.37 155.96 0 bottom
SB39  Open  [SB_0603]  67.06 150.5 90 bottom
SB40  Open  [SB_0603]  69.09 150.5 90 bottom
SB41  Closed  [SB_0603]  85.85 151.76 180 bottom
SB42  Closed  [SB_0603]  85.85 150.24 180 bottom
SB43  Closed  [SB_0603]  39.24 147.19 180 bottom
SB44  Open  [SB_0603]  27.05 147.83 0 bottom
SB45  Open  [SB_0603]  78.38 132.99 0 bottom
SB46  Closed  [SB_0603]  33.78 129.67 0 bottom
SB47  Open  [SB_0603]  33.78 128.09 0 bottom
SB48  Open  [SB_0603]  39.12 128.02 0 bottom
SB49  Open  [SB_0603]  33.78 126.54 0 bottom
SB50  Closed  [SB_0603]  114.43 146.05 0 top
SB51  Closed  [SB_0603]  33.78 124.97 0 bottom
SB52  Open  [SB_0603]  31.24 82.68 180 bottom
SB53  Open  [SB_0603]  36.83 30.99 180 bottom
SB54  Closed  [SB_0603]  124.08 8.89 90 bottom
SB55  Closed  [SB_0603]  132.46 8.76 270 bottom
SB56  Open  [SB_0603]  87.12 135.76 180 top
SB57  Closed  [SB_0603]  87.12 137.29 180 top
SB58  Closed  [SB_0603]  121.67 104.78 0 top
SB59  Closed  [SB_0603]  115.06 142.75 90 top
SB60  Closed  [SB_0603]  117.86 142.75 90 top
SB61  Open  [SB_0603]  31.24 82.68 180 top
SW1  09.03290.01  [SW1_3TH_2R54_10X2R5]  35.56 161.42 90 top
SW2  MS-23D18  [SW1_8TH_13X3R5]  116.46 20.83 0 top
T1  STS5PF30L  [SOIC8_1R27_4R9X6]  28.32 64.52 270 top
T2  9013  [SOT-23]  21.46 63.12 180 top
T3  9013  [SOT-23]  12.7 43.69 270 top
T4  9013  [SOT-23]  14.22 19.05 180 top
T5  9013  [SOT-23]  10.16 79.76 270 bottom
T6  9013  [SOT-23]  13.59 62.1 180 bottom
T7  STT4P3LLH6[N_A]  [SOT23-6L]  28.32 64.9 180 top
TP1  Ground  [TP]  120.65 170.56 0 top
TP2  Ground  [TP]  29.77 170.03 0 top
TP3  VDDA  [TP]  62.74 155.07 90 top
TP4  VREF  [TP]  62.74 157.23 0 top
TP5  5V  [TP]  8.51 133.73 90 top
TP6  Ground  [TP]  22.35 114.81 0 top
TP7  +3V3  [TP]  22.35 103.63 180 top
TP8  mco1  [TP]  108.71 102.06 180 top
TP9  2V9_SD  [TP]  114.17 98.04 90 top
TP10  mco1  [TP]  75.95 33.91 270 top
TP11  Ground  [TP]  58.04 14.1 90 top
TP12  1V8  [TP]  136.53 13.34 0 top
U2  MCP2562FD  [SOIC8_1R27_4R9X6]  89.79 156.08 270 top
U3  USBLC6-4SC6  [SOT23-6]  132.59 153.29 0 top
U4  ST3241EBPR  [SSOP28_0R65_10R2X7R8]  53.34 153.03 180 top
U5  LAN8742A-CZ-TR  [QFN24_0R5_4X4]  133.22 140.34 0 top
U6  MT25TL01GHBA8ESF-0SIT  [SOIC16W_1R27_10R3X10R33]  20.12 149.35 180 top
U7  STM32H7  [BGA265_0R8_14X14_SKT]  71.17 137.67 270 top
U8  ESDALC6V1W5  [SOT-353]  130.05 126.49 0 top
U9  LDK120M33R  [SOT23-5]  16.89 123.57 0 top
U10  ESDALC6V1W5  [SOT-353]  122.68 119.76 90 top
U11  ESDALC6V1W5  [SOT-353]  130.05 119.38 180 top
U12  PC28F128M29EWLA  [FBGA64_1_11X13]  70.79 102.87 270 top
U13  USB3320C-EZK  [QFN32_0R5_5X5]  29.84 87.38 180 top
U14  STMPS2151STR  [SOT23-5]  18.29 82.55 270 top
U15  IS42S32800G-6BLI  [FBGA90_0R8_8X13]  75.82 78.87 270 top
U16  IS61WV102416BLL-10MLI  [BGA48_0R75_9X11]  50.8 78.36 270 top
U17  ST1L05BPUR  [DFN6_0R95_3X3]  116.33 56.64 0 top
U18  STMPS2151STR  [SOT23-5]  10.67 55.12 0 top
U19  ST890CDR  [SOIC8_1R27_4R9X6]  27.97 53.21 0 top
U20  LD1086D2M33  [TO263-3]  41.53 53.85 180 top
U21  LD1117S18TR  [SOT-223]  97.28 39.37 270 top
U22  WM8994ECS_R  [BGA72_0R5_4R5X4]  110.36 33.78 180 top
U23  STM32F103CBT6  [LQFP48_0R5_9X9]  32.89 30.1 180 top
U24  STM32L152CCT6  [LQFP48_0R5_9X9]  73.03 26.67 180 top
U25  USBLC6-2SC6  [SOT23-6L]  8.26 22.61 270 top
U26  -  [MP34DT01TR]  127.68 8.89 270 top
U27  -  [MP34DT01TR]  106.68 8.89 270 top
U28  MT25QL512ABA8ESF-0SIT[N_A]  [SOIC16W_1R27_10R3X10R33]  20.12 149.35 0 bottom
X1  NX3225HA-25MHz-EXS00A-CH00343  [XTAL_4SM_3R2X2R5]  67.44 154.81 180 top
X2  NX3215SA-32.768KHZ-EXS00A-MU00526  [XTAL_2SM_3R2X1R5]  77.09 153.54 0 top
X3  X53T-C20SSA-25.000MHz  [XTAL_2SM_5X3R2]  122.17 140.59 270 top
X4  24MHz  [XTAL1]  30.86 78.11 0 top
X5  NX3225GD-8.000M-EXS00A-CG04874  [XTAL_2SM_3R2X2R5_H1]  44.96 29.21 270 top
Z1  SMAJ5.0A-TR  [SMA]  16.43 112.88 0 top

## Library data of the parts
B1-B3 = PB10
B4 = MT-008A
BT1 = BAT_2SM_CR1220
C3-C6 C10-C12 C14 C17 C19 C23-C25 C28 C31-C34 C37 C38 C41-C45 C47 C49 C52 C54 C57 C63 C67-C69 C72 C78 C81 C87-C89 C91 C93 C95 C96 C100-C103 C112 C137-C141 C145 C146 C148 C149 C153-C156 C158 C162 C164-C166 = 0603C: signal model: DEFAULT_CAPACITOR_100000pF_1_2
C7 C55 C66 C92 = 0603C: signal model: DEFAULT_CAPACITOR_20pF_1_2
C8 C20 C71 C74 C75 C79 C80 C86 C94 C142 C143 C150 C152 = 0603C: signal model: DEFAULT_CAPACITOR_4.7e+06pF_1_2
C9 = 0603C: signal model: DEFAULT_CAPACITOR_6.7pF_1_2
C13 C82 C119 C120 C126 C167 = 0402C: signal model: DEFAULT_CAPACITOR_4.7e+06pF_1_2
C15 C29 C64 = 0603C: signal model: DEFAULT_CAPACITOR_10000pF_1_2
C16 = 0603C: signal model: DEFAULT_CAPACITOR_30pF_1_2
C18 C22 C30 C104 C111 = 0603C: signal model: DEFAULT_CAPACITOR_2.2e+06pF_2_1
C21 C35 C40 C50 C51 C53 C56 C58 C59 C106 C107 C147 = TAN-A: signal model: DEFAULT_CAPACITOR_100000pF_1_2
C26 C109 C110 C114 C115 C117 C118 C121 C122 C125 C129 C131 C133-C135 C163 C168 = 0402C: signal model: DEFAULT_CAPACITOR_100000pF_1_2
C27 = 1206C: signal model: DEFAULT_CAPACITOR_100000pF_1_2
C36 = C310M-6: signal model: DEFAULT_CAPACITOR_100000pF_1_2
C39 C65 C70 C159-C161 C170 = 0603C: signal model: DEFAULT_CAPACITOR_1e+07pF_1_2
C46 = CAE_5R3X5R3_H5R4: signal model: DEFAULT_CAPACITOR_100000pF_1_2
C48 C172 = 0603C
C60 C73 C77 C90 C144 C151 = 0603C: signal model: DEFAULT_CAPACITOR_1e+06pF_1_2
C61 C105 = 0603C: signal model: DEFAULT_CAPACITOR_2.2e+06pF_1_2
C62 = 0603C: signal model: DEFAULT_CAPACITOR_1000pF_1_2
C76 = TAN-A: signal model: DEFAULT_CAPACITOR_2.2e+06pF_1_2
C83 C84 = 0603C: signal model: DEFAULT_CAPACITOR_10pF_1_2
C85 C124 C128 C132 = 0402C: signal model: DEFAULT_CAPACITOR_1e+06pF_1_2
C99 = 0603C: signal model: DEFAULT_CAPACITOR_33pF_1_2
C108 = 0402C: signal model: DEFAULT_CAPACITOR_33pF_1_2
C113 = TAN-A: signal model: DEFAULT_CAPACITOR_22pF_1_2
C116 = 0603C: signal model: DEFAULT_CAPACITOR_22pF_1_2
C123 C127 = 0402C: signal model: DEFAULT_CAPACITOR_10000pF_1_2
C130 = 0402C: signal model: DEFAULT_CAPACITOR_30pF_1_2
C136 = 0603C: signal model: DEFAULT_CAPACITOR_4.7e+07pF_2_1
C157 = 0603C: signal model: DEFAULT_CAPACITOR_2.2e+08pF_1_2
C169 C171 = 0402C: signal model: DEFAULT_CAPACITOR_2.2e+06pF_1_2
CN1 = RJ45_J0011D01BNL
CN2 CN3 = DB9_M
CN4 = SSM-104-L-DH
CN5 CN24 JP1-JP3 JP6 JP9 JP13-JP15 = SIP2
CN6 CN7 = FTR-130-53-L-D-LC
CN8 = FTSH-110-01-L-DV
CN9 = IDC20S
CN10 = PWR_JACK_DC10
CN11 CN12 = FTR-120-53-L-D-LC
CN13 = MSD_PJS008_
CN14 CN16 CN18 = MOLEX_47590001
CN15 = QSH-030-01-F-D-A
CN17 CN19 = PJ3028B
CN20 = FTSH-125-01-F-DV
CN21 CN22 = HDR_2X3-1_2R54-6
CN23 = MICRO_USB_B_105017
CN25 CN26 = COUPON
D1 D3-D9 D15 D16 = SOD-323
D2 = SOT-323
D10 = TYCO_ZEN056V130A24LS
D11 = BGA4_0R4_0R8X0R8
D12 = BGA4_0R4_1X1
D13 D14 T7 U25 = SOT23-6L
H1-H4 = HOLE_C9D4R5
JP5 JP7 JP8 JP11 JP12 = SIP3
JP10 = HDR_2X6_2R54
L1 = LSM2_VLS2016E_S
L2 L4-L12 = 0603L
L3 = BNX001
LD1-LD11 = 0603D
LD12 = LED2_3528
M1 = WLCSP25_0R4_MOUDLE_REV
R3 R42 R43 R83 R87 R95 R118 R129 R130 R132 R140 R163 R167 R175 R180 R185-R188 R190 R192-R194 R286 = 0603R: signal model: DEFAULT_RESISTOR_10000OHM_1_2
R4 R5 R7 R8 R28 R30 R32 R36 R39 R40 R55-R57 R59-R65 R78-R80 R85 R90 R94 R101 R120 R121 R124 R139 R141 R161 R169 R171 R196-R198 R213 R214 R225 R229 R237 R238 R253 R284 R287 R289 R290 R293 = 0603R: signal model: DEFAULT_RESISTOR_33OHM_1_2
R6 R9 R11 R12 R15 R35 R44-R46 R81 R84 R89 R96 R100 R103 R107-R109 R111 R113 R114 R116 R117 R123 R126 R131 R146 R148 R151 R152 R155 R157 R164 R166 R168 R172 R173 R204 R205 R218 R233 R281-R283 R291 = 0603R: signal model: DEFAULT_RESISTOR_0.001OHM_1_2
R10 R21 R206 = 0603R: signal model: DEFAULT_RESISTOR_47OHM_1_2
R13 R14 R50 R51 R53 R54 R58 R66-R77 R217 R219 R221-R224 R226 R230 R231 R234 R236 R240 R242 R243 R245 R246 R248 R250-R252 R256-R280 = 0402R: signal model: DEFAULT_RESISTOR_10000OHM_1_2
R16 R211 = 0603R: signal model: DEFAULT_RESISTOR_240OHM_1_2
R17 = 0402R: signal model: DEFAULT_RESISTOR_47000OHM_1_2
R18 = 0402R: signal model: DEFAULT_RESISTOR_4870OHM_1_2
R19 R138 R150 = 0402R: signal model: DEFAULT_RESISTOR_33OHM_1_2
R20 R29 R34 R228 R232 R235 R239 R244 = 0402R: signal model: 0402R_33
R22-R25 = 0603R: signal model: DEFAULT_RESISTOR_50OHM_1_2
R26 R27 R31 R215 = 0603R: signal model: DEFAULT_RESISTOR_220000OHM_1_2
R33 R38 R52 = 0603R: signal model: 0603R_33
R37 R41 R49 R86 R127 R181 R241 = 0603R: signal model: 0603R_[n/a]
R47 R165 = 0603R: signal model: DEFAULT_RESISTOR_330OHM_1_2
R48 R159 = 0603R: signal model: DEFAULT_RESISTOR_820OHM_1_2
R82 R128 = 0603R: signal model: DEFAULT_RESISTOR_510OHM_1_2
R88 R142 = 0603R: signal model: DEFAULT_RESISTOR_100000OHM_1_2
R91 R210 R212 R255 = 0603R: signal model: DEFAULT_RESISTOR_2200OHM_1_2
R92 R93 = 0603R: signal model: DEFAULT_RESISTOR_680OHM_1_2
R97-R99 R102 R106 R110 R112 R115 R254 R285 = 0603R: signal model: 0603R_[N_A]
R104 R105 = 0603R: signal model: 0603R_0
R119 R137 R154 R209 = 0603R: signal model: DEFAULT_RESISTOR_22000OHM_1_2
R122 R135 R144 R153 R199-R202 R247 R249 = 0603R: signal model: DEFAULT_RESISTOR_47000OHM_1_2
R125 = 0603R: signal model: DEFAULT_RESISTOR_3300OHM_1_2
R133 R191 R195 = 0603R: signal model: DEFAULT_RESISTOR_1000OHM_1_2
R134 R136 R177 = 0603R: signal model: DEFAULT_RESISTOR_100OHM_1_2
R143 R292 = 0603R: signal model: DEFAULT_RESISTOR_2700OHM_1_2
R145 = 0603R: signal model: DEFAULT_RESISTOR_120OHM_1_2
R147 R158 R184 = 0402R: signal model: DEFAULT_RESISTOR_0.001OHM_1_2
R149 = 0402R: signal model: DEFAULT_RESISTOR_100000OHM_1_2
R156 = 0402R: signal model: DEFAULT_RESISTOR_3300OHM_1_2
R160 = 0603R: signal model: DEFAULT_RESISTOR_150OHM_1_2
R162 R176 R183 R216 = 0603R: signal model: DEFAULT_RESISTOR_4700OHM_1_2
R170 SB1 SB4 = 0402R
R174 = 0402R: signal model: DEFAULT_RESISTOR_4700OHM_1_2
R178 = 0603R: signal model: DEFAULT_RESISTOR_36000OHM_1_2
R179 R203 R208 = 0603R: signal model: DEFAULT_RESISTOR_1500OHM_1_2
R182 = 0402R: signal model: DEFAULT_RESISTOR_120OHM_1_2
R189 = 0603R: signal model: DEFAULT_RESISTOR_180OHM_1_2
R207 = 0603R: signal model: DEFAULT_RESISTOR_5.1OHM_1_2
R220 = 0603R: signal model: DEFAULT_RESISTOR_20OHM_1_2
R227 R288 = 0603R: signal model: DEFAULT_RESISTOR_620OHM_1_2
R294-R299 = 0603R
RV1 = 3386P
SB2 SB3 SB5-SB9 SB11-SB13 SB15 SB18 SB19 SB22 SB23 SB26 SB27 SB30-SB34 SB37 SB38 SB41-SB43 SB54 SB55 SB57 SB58 = SB_0603: signal model: SB_0603_Closed
SB10 SB14 SB16 SB17 SB20 SB21 SB24 SB25 SB28 SB29 SB35 SB36 SB39 SB40 SB44 SB45 SB47-SB49 SB52 SB53 SB56 = SB_0603: signal model: SB_0603_Open
SB46 SB50 SB51 SB59-SB61 = SB_0603
SW1 = SW1_3TH_2R54_10X2R5
SW2 = SW1_8TH_13X3R5
T1 U2 U19 = SOIC8_1R27_4R9X6
T2-T6 = SOT-23
TP1-TP12 = TP
U3 = SOT23-6
U4 = SSOP28_0R65_10R2X7R8
U5 = QFN24_0R5_4X4
U6 U28 = SOIC16W_1R27_10R3X10R33
U7 = BGA265_0R8_14X14_SKT
U8 U10 U11 = SOT-353
U9 U14 U18 = SOT23-5
U12 = FBGA64_1_11X13
U13 = QFN32_0R5_5X5
U15 = FBGA90_0R8_8X13
U16 = BGA48_0R75_9X11
U17 = DFN6_0R95_3X3
U20 = TO263-3
U21 = SOT-223
U22 = BGA72_0R5_4R5X4
U23 U24 = LQFP48_0R5_9X9
U26 U27 = MP34DT01TR
X1 = XTAL_4SM_3R2X2R5
X2 = XTAL_2SM_3R2X1R5
X3 = XTAL_2SM_5X3R2
X4 = XTAL1
X5 = XTAL_2SM_3R2X2R5_H1
Z1 = SMA

## Footprints (pads in the part's own frame, mm; a bottom-side part is the same pattern mirrored in y, then rotated)
0402C
  rect 0.559x0.559 smd: 1(-0.508,0) 2(0.508,0)
0402R
  rect 0.559x0.559 smd: 1(-0.508,0) 2(0.508,0)
0603C
  rect 0.889x0.813 smd: 1(-0.762,0) 2(0.762,0)
0603D
  rect 0.889x0.813 smd: 1(-0.762,0) 2(0.762,0)
0603L
  rect 0.889x0.813 smd: 1(-0.762,0) 2(0.762,0)
0603R
  rect 0.787x0.813 smd: 1(-0.762,0) 2(0.762,0)
1206C
  rect 1.168x1.524 smd: 1(-1.473,0) 2(1.473,0)
3386P
  rect 1.168x1.168 hole 0.762: 1(-2.54,0)
  round 1.168 hole 0.762: 2(0,2.54) 3(2.54,0)
BAT_2SM_CR1220
  round 1.473 hole 1.473 unplated: (-3.75,0)
  round 1.194 hole 1.194 unplated: (3.75,0)
  rect 4.064x2.159 smd: 1(-7.95,0) 2(7.95,0)
BGA4_0R4_0R8X0R8
  round 0.229 smd: A1(-0.2,0.2) A2(0.2,0.2) B1(-0.2,-0.2) B2(0.2,-0.2)
BGA4_0R4_1X1
  round 0.229 smd: A1(-0.2,0.2) A2(0.2,0.2) B1(-0.2,-0.2) B2(0.2,-0.2)
BGA48_0R75_9X11
  round 0.356 smd: A1(-1.875,2.625) A2(-1.125,2.625) A3(-0.375,2.625) A4(0.375,2.625) A5(1.125,2.625) A6(1.875,2.625) B1(-1.875,1.875) B2(-1.125,1.875) B3(-0.375,1.875) B4(0.375,1.875) B5(1.125,1.875) B6(1.875,1.875) C1(-1.875,1.125) C2(-1.125,1.125) C3(-0.375,1.125) C4(0.375,1.125) C5(1.125,1.125) C6(1.875,1.125) D1(-1.875,0.375) D2(-1.125,0.375) D3(-0.375,0.375) D4(0.375,0.375) D5(1.125,0.375) D6(1.875,0.375) E1(-1.875,-0.375) E2(-1.125,-0.375) E3(-0.375,-0.375) E4(0.375,-0.375) E5(1.125,-0.375) E6(1.875,-0.375) F1(-1.875,-1.125) F2(-1.125,-1.125) F3(-0.375,-1.125) F4(0.375,-1.125) F5(1.125,-1.125) F6(1.875,-1.125) G1(-1.875,-1.875) G2(-1.125,-1.875) G3(-0.375,-1.875) G4(0.375,-1.875) G5(1.125,-1.875) G6(1.875,-1.875) H1(-1.875,-2.625) H2(-1.125,-2.625) H3(-0.375,-2.625) H4(0.375,-2.625) H5(1.125,-2.625) H6(1.875,-2.625)
BGA72_0R5_4R5X4
  round 0.249 smd: A1(-2,1.75) A2(-1.5,1.75) A3(-1,1.75) A4(-0.5,1.75) A5(0,1.75) A6(0.5,1.75) A7(1,1.75) A8(1.5,1.75) A9(2,1.75) B1(-2,1.25) B2(-1.5,1.25) B3(-1,1.25) B4(-0.5,1.25) B5(0,1.25) B6(0.5,1.25) B7(1,1.25) B8(1.5,1.25) B9(2,1.25) C1(-2,0.75) C2(-1.5,0.75) C3(-1,0.75) C4(-0.5,0.75) C5(0,0.75) C6(0.5,0.75) C7(1,0.75) C8(1.5,0.75) C9(2,0.75) D1(-2,0.25) D2(-1.5,0.25) D3(-1,0.25) D4(-0.5,0.25) D5(0,0.25) D6(0.5,0.25) D7(1,0.25) D8(1.5,0.25) D9(2,0.25) E1(-2,-0.25) E2(-1.5,-0.25) E3(-1,-0.25) E4(-0.5,-0.25) E5(0,-0.25) E6(0.5,-0.25) E7(1,-0.25) E8(1.5,-0.25) E9(2,-0.25) F1(-2,-0.75) F2(-1.5,-0.75) F3(-1,-0.75) F4(-0.5,-0.75) F5(0,-0.75) F6(0.5,-0.75) F7(1,-0.75) F8(1.5,-0.75) F9(2,-0.75) G1(-2,-1.25) G2(-1.5,-1.25) G3(-1,-1.25) G4(-0.5,-1.25) G5(0,-1.25) G6(0.5,-1.25) G7(1,-1.25) G8(1.5,-1.25) G9(2,-1.25) H1(-2,-1.75) H2(-1.5,-1.75) H3(-1,-1.75) H4(-0.5,-1.75) H5(0,-1.75) H6(0.5,-1.75) H7(1,-1.75) H8(1.5,-1.75) H9(2,-1.75)
BGA265_0R8_14X14_SKT
  round 0.85 hole 0.85 unplated: (-8.74,-3.282) (7.985,5.822)
  round 2.388 hole 1.626: 1(-8.74,8.362) 2(7.985,8.362) 3(-8.74,-8.362) 4(7.985,-8.362)
  round 0.406 smd: A1(-6.4,6.4) A2(-5.6,6.4) A3(-4.8,6.4) A4(-4,6.4) A5(-3.2,6.4) A6(-2.4,6.4) A7(-1.6,6.4) A8(-0.8,6.4) A9(0,6.4) A10(0.8,6.4) A11(1.6,6.4) A12(2.4,6.4) A13(3.2,6.4) A14(4,6.4) A15(4.8,6.4) A16(5.6,6.4) A17(6.4,6.4) B1(-6.4,5.6) B2(-5.6,5.6) B3(-4.8,5.6) B4(-4,5.6) B5(-3.2,5.6) B6(-2.4,5.6) B7(-1.6,5.6) B8(-0.8,5.6) B9(0,5.6) B10(0.8,5.6) B11(1.6,5.6) B12(2.4,5.6) B13(3.2,5.6) B14(4,5.6) B15(4.8,5.6) B16(5.6,5.6) B17(6.4,5.6) C1(-6.4,4.8) C2(-5.6,4.8) C3(-4.8,4.8) C4(-4,4.8) C5(-3.2,4.8) C6(-2.4,4.8) C7(-1.6,4.8) C8(-0.8,4.8) C9(0,4.8) C10(0.8,4.8) C11(1.6,4.8) C12(2.4,4.8) C13(3.2,4.8) C14(4,4.8) C15(4.8,4.8) C16(5.6,4.8) C17(6.4,4.8) D1(-6.4,4) D2(-5.6,4) D3(-4.8,4) D4(-4,4) D5(-3.2,4) D6(-2.4,4) D7(-1.6,4) D8(-0.8,4) D9(0,4) D10(0.8,4) D11(1.6,4) D12(2.4,4) D13(3.2,4) D14(4,4) D15(4.8,4) D16(5.6,4) D17(6.4,4) E1(-6.4,3.2) E2(-5.6,3.2) E3(-4.8,3.2) E4(-4,3.2) E5(-3.2,3.2) E6(-2.4,3.2) E7(-1.6,3.2) E8(-0.8,3.2) E9(0,3.2) E10(0.8,3.2) E11(1.6,3.2) E12(2.4,3.2) E13(3.2,3.2) E14(4,3.2) E15(4.8,3.2) E16(5.6,3.2) E17(6.4,3.2) F1(-6.4,2.4) F2(-5.6,2.4) F3(-4.8,2.4) F4(-4,2.4) F5(-3.2,2.4) F13(3.2,2.4) F14(4,2.4) F15(4.8,2.4) F16(5.6,2.4) F17(6.4,2.4) G1(-6.4,1.6) G2(-5.6,1.6) G3(-4.8,1.6) G4(-4,1.6) G5(-3.2,1.6) G7(-1.6,1.6) G8(-0.8,1.6) G9(0,1.6) G10(0.8,1.6) G11(1.6,1.6) G13(3.2,1.6) G14(4,1.6) G15(4.8,1.6) G16(5.6,1.6) G17(6.4,1.6) H1(-6.4,0.8) H2(-5.6,0.8) H3(-4.8,0.8) H4(-4,0.8) H5(-3.2,0.8) H7(-1.6,0.8) H8(-0.8,0.8) H9(0,0.8) H10(0.8,0.8) H11(1.6,0.8) H13(3.2,0.8) H14(4,0.8) H15(4.8,0.8) H16(5.6,0.8) H17(6.4,0.8) J1(-6.4,0) J2(-5.6,0) J3(-4.8,0) J4(-4,0) J5(-3.2,0) J7(-1.6,0) J8(-0.8,0) J9(0,0) J10(0.8,0) J11(1.6,0) J13(3.2,0) J14(4,0) J15(4.8,0) J16(5.6,0) J17(6.4,0) K1(-6.4,-0.8) K2(-5.6,-0.8) K3(-4.8,-0.8) K4(-4,-0.8) K5(-3.2,-0.8) K7(-1.6,-0.8) K8(-0.8,-0.8) K9(0,-0.8) K10(0.8,-0.8) K11(1.6,-0.8) K13(3.2,-0.8) K14(4,-0.8) K15(4.8,-0.8) K16(5.6,-0.8) K17(6.4,-0.8) L1(-6.4,-1.6) L2(-5.6,-1.6) L3(-4.8,-1.6) L4(-4,-1.6) L5(-3.2,-1.6) L7(-1.6,-1.6) L8(-0.8,-1.6) L9(0,-1.6) L10(0.8,-1.6) L11(1.6,-1.6) L13(3.2,-1.6) L14(4,-1.6) L15(4.8,-1.6) L16(5.6,-1.6) L17(6.4,-1.6) M1(-6.4,-2.4) M2(-5.6,-2.4) M3(-4.8,-2.4) M4(-4,-2.4) M5(-3.2,-2.4) M13(3.2,-2.4) M14(4,-2.4) M15(4.8,-2.4) M16(5.6,-2.4) M17(6.4,-2.4) N1(-6.4,-3.2) N2(-5.6,-3.2) N3(-4.8,-3.2) N4(-4,-3.2) N5(-3.2,-3.2) N6(-2.4,-3.2) N7(-1.6,-3.2) N8(-0.8,-3.2) N9(0,-3.2) N10(0.8,-3.2) N11(1.6,-3.2) N12(2.4,-3.2) N13(3.2,-3.2) N14(4,-3.2) N15(4.8,-3.2) N16(5.6,-3.2) N17(6.4,-3.2) P1(-6.4,-4) P2(-5.6,-4) P3(-4.8,-4) P4(-4,-4) P5(-3.2,-4) P6(-2.4,-4) P7(-1.6,-4) P8(-0.8,-4) P9(0,-4) P10(0.8,-4) P11(1.6,-4) P12(2.4,-4) P13(3.2,-4) P14(4,-4) P15(4.8,-4) P16(5.6,-4) P17(6.4,-4) R1(-6.4,-4.8) R2(-5.6,-4.8) R3(-4.8,-4.8) R4(-4,-4.8) R5(-3.2,-4.8) R6(-2.4,-4.8) R7(-1.6,-4.8) R8(-0.8,-4.8) R9(0,-4.8) R10(0.8,-4.8) R11(1.6,-4.8) R12(2.4,-4.8) R13(3.2,-4.8) R14(4,-4.8) R15(4.8,-4.8) R16(5.6,-4.8) R17(6.4,-4.8) T1(-6.4,-5.6) T2(-5.6,-5.6) T3(-4.8,-5.6) T4(-4,-5.6) T5(-3.2,-5.6) T6(-2.4,-5.6) T7(-1.6,-5.6) T8(-0.8,-5.6) T9(0,-5.6) T10(0.8,-5.6) T11(1.6,-5.6) T12(2.4,-5.6) T13(3.2,-5.6) T14(4,-5.6) T15(4.8,-5.6) T16(5.6,-5.6) T17(6.4,-5.6) U1(-6.4,-6.4) U2(-5.6,-6.4) U3(-4.8,-6.4) U4(-4,-6.4) U5(-3.2,-6.4) U6(-2.4,-6.4) U7(-1.6,-6.4) U8(-0.8,-6.4) U9(0,-6.4) U10(0.8,-6.4) U11(1.6,-6.4) U12(2.4,-6.4) U13(3.2,-6.4) U14(4,-6.4) U15(4.8,-6.4) U16(5.6,-6.4) U17(6.4,-6.4)
